# Altium PCB BLE主板.PcbDoc
Units mm, origin at the board's own origin, x right, y up, seen from the top; angles counter-clockwise.
Board outline 49 x 29 mm, 2 copper layers (Top Layer, Bottom Layer); 38 components, 25 nets, 137 pads, 120 vias.
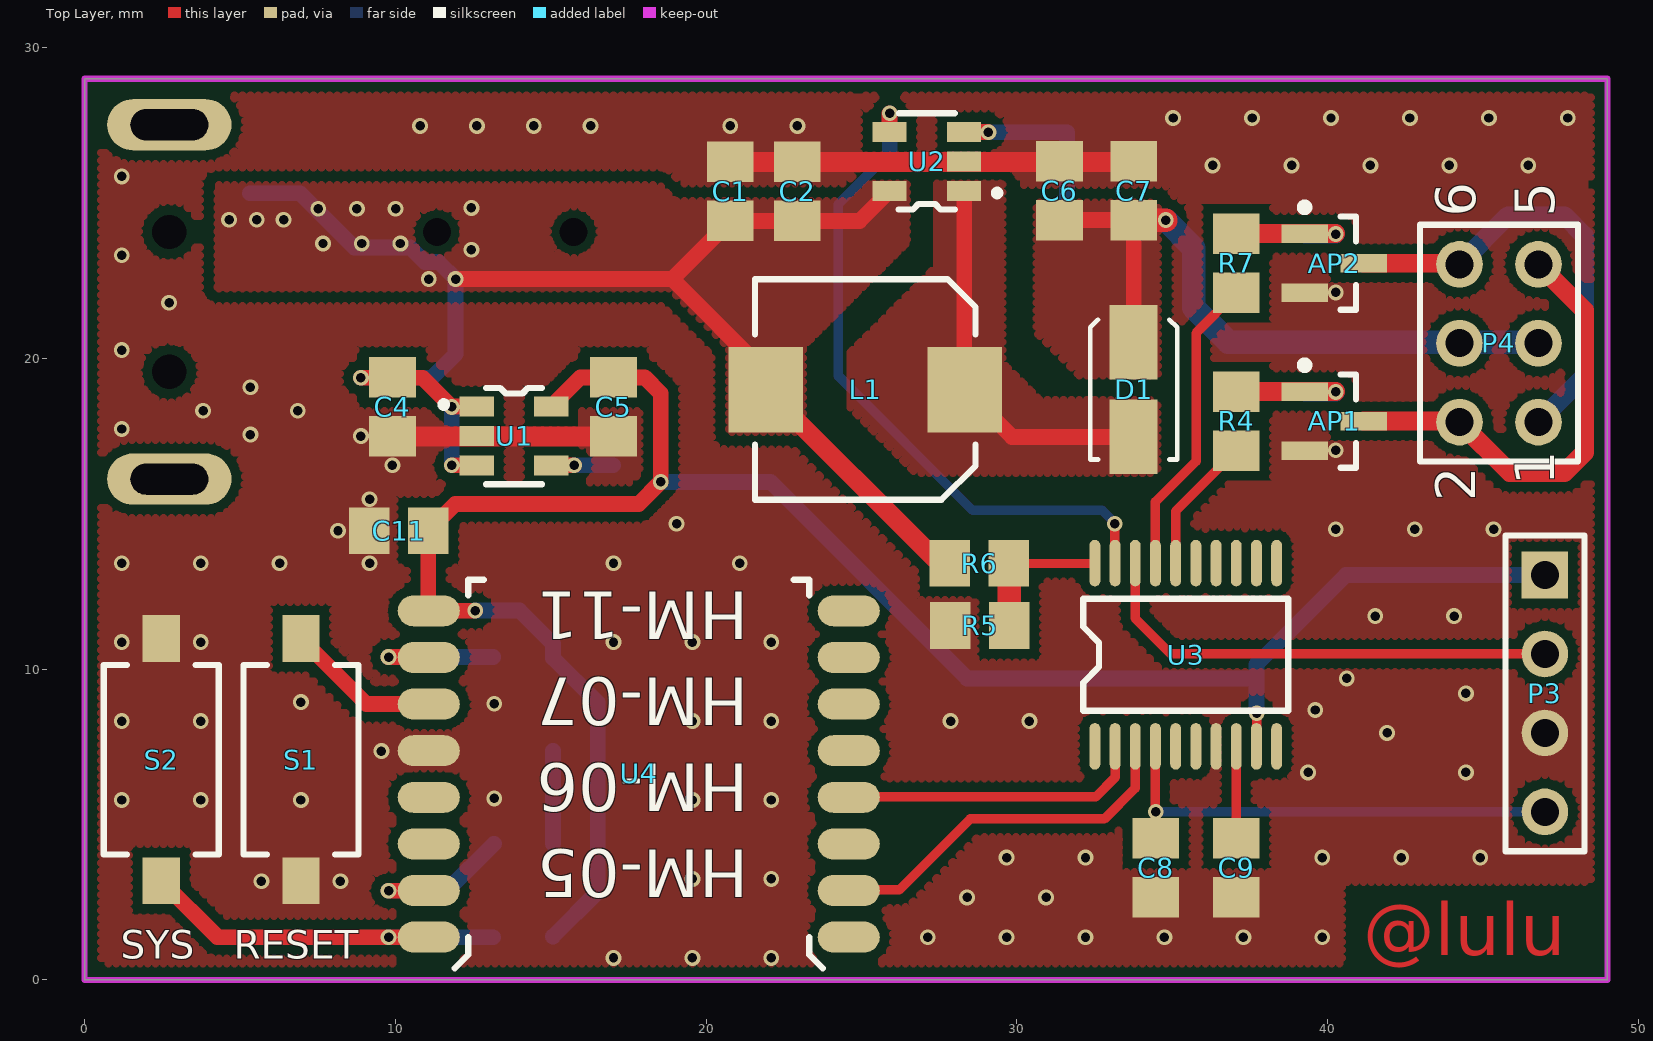
[diagram p0: Top Layer view]
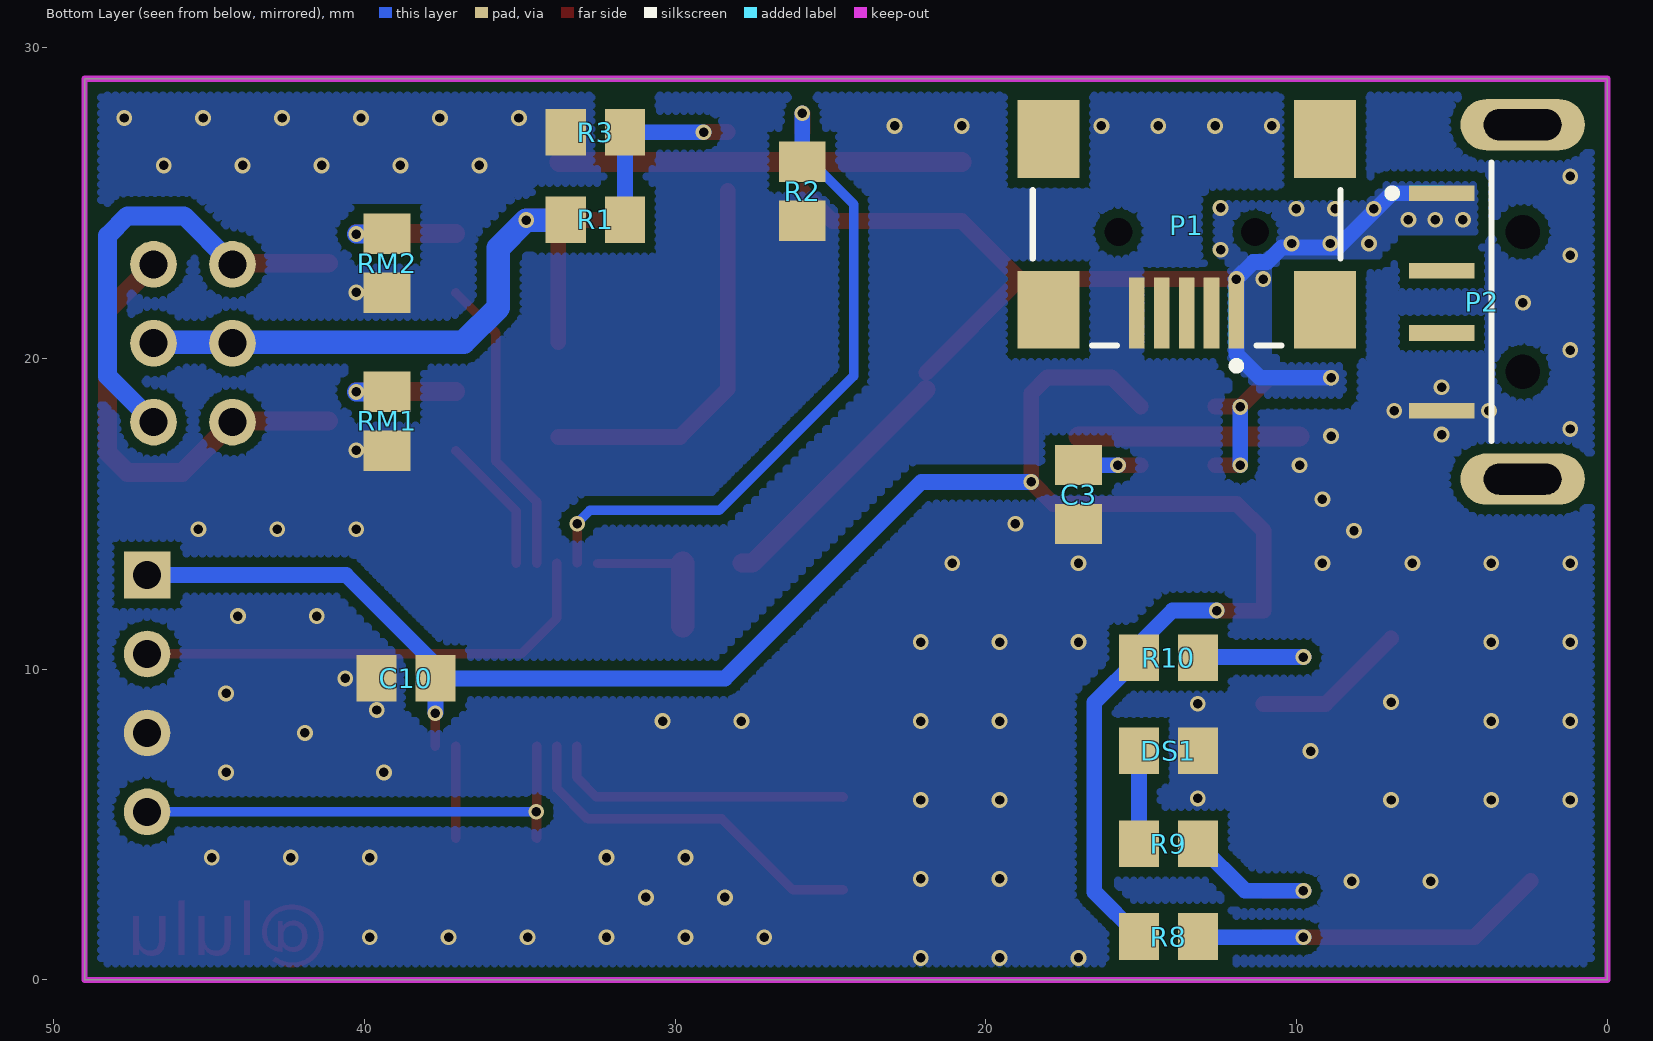
[diagram p1: Bottom Layer view, seen from below]

## Layer stack, top to bottom
Top Layer: signal copper 0.0356
Dielectric: dielectric 0.32, FR-4, Dk 4.8
Bottom Layer: signal copper 0.0356

## Board outline
0,0 49,0 49,29 0,29

## Design rules (kind name [scope] priority, off if disabled: settings)
Clearance [All] p1: gap=0.254
PolygonConnect [All] p1: connectstyle=Direct reliefconductorwidth=0.254 reliefentries=4 polygonreliefangle="90 Angle"
RoutingVias [All] p1: holewidth=0.711 width=1.27 viastyle="Through Hole" minholewidth=0.152 minwidth=0.254 maxholewidth=2.54 maxwidth=2.54
SilkscreenOverComponentPads [All] p1: minsilkscreentomaskgap=0.254
SolderMaskExpansion [All] p1: expansion=0.102
Width [All] p1: maxlimit=2.54 minlimit=0.152 preferedwidth=0.254
27 further rules are at their usual default settings.

## Components (designator, comment, footprint, x,y, rotation, side; value= is the part's Value field where it differs from the comment)
AP1 "AP2310" SOT23-3N 40.208,17.983 r0 top
AP2 "AP2310" SOT23-3N 40.208,23.063 r0 top
C1 "4.7u" 2012[0805] 20.777,25.375 r90 top
C2 "0.1u" 2012[0805] 22.936,25.375 r90 top
C3 "10n" 2012[0805] 17.018,15.621 r90 bottom
C4 "2.2u" 2012[0805] 9.906,18.44 r90 top
C5 "4.7u" 2012[0805] 17.018,18.44 r90 top
C6 "0.1u" 2012[0805] 31.369,25.4 r270 top
C7 "4.7u" 2012[0805] 33.757,25.4 r90 top
C8 "22n" 2012[0805] 34.468,3.607 r90 top
C9 "680n" 2012[0805] 37.059,3.607 r90 top
C10 "0.1u" 2012[0805] 38.659,9.703 r180 bottom
C11 "0.1u" 2012[0805] 10.109,14.453 r0 top
D1 "SS14" DIOM4227X23N[DO-214AC(SMA)] 33.757,18.999 r90 top
DS1 "LED0" 2012[0805] 14.122,7.374 r180 bottom
L1 "4.7u" INDP7070X40N 25.121,18.999 r180 top
P1 "USB_mini B_FEMALE" USB/SM0.8-6H5 13.538,29.312 r90 bottom
P2 "USB-A-MALE" USB/SM2.5-4H4 0.025,21.819 r180 bottom
P3 "DEBUG" HDR1X4 46.99,13.03 r270 top
P4 "Header 3X2" HDR2X3 46.782,17.949 r90 top
R1 "1.5M" 2012[0805] 32.563,24.46 r0 bottom
R2 "10k" 2012[0805] 25.908,25.375 r90 bottom
R3 "180k" 2012[0805] 32.563,27.28 r180 bottom
R4 "33R" 2012[0805] 37.059,17.983 r270 top
R5 "33k" 2012[0805] 28.804,11.405 r0 top
R6 "22k" 2012[0805] 28.793,13.411 r180 top
R7 "33R" 2012[0805] 37.059,23.063 r270 top
R8 "4.7k" 2012[0805] 14.122,1.397 r180 bottom
R9 "Res1" 2012[0805] 14.122,4.386 r0 bottom
R10 "0R" 2012[0805] 14.122,10.363 r0 bottom
RM1 "opt" 2012[0805] 39.268,17.983 r90 bottom
RM2 "opt" 2012[0805] 39.268,23.063 r90 bottom
S1 "RESET" 微动开关 6.96,7.087 r270 top
S2 "SYS" 微动开关 2.464,7.087 r90 top
U1 "LP2985" SOT23-5AN 13.818,17.501 r0 top
U2 "TD8210" SOT23-5AN 27.102,26.34 r180 top
U3 "STM8S103F3" TSOP65P640-20BN 35.433,10.465 r90 top
U4 "www.jnhuamao.cn" HM_05_06_07_11 24.587,12.878 r180 top

## Footprints (in the part's own frame and the unit in brackets; to place one, negate y for a bottom-side part, rotate by r counter-clockwise, add the part's x,y. Pads: shape width x height; smd on the part's side, far side on the other; paste and mask are expansions set on the pad)
2012[0805] [mm] "Chip Resistor; Body 2.0 x 1.3 mm"
  rect 1.3x1.5 smd: 1(-0.95,0) 2(0.95,0)
DIOM4227X23N[DO-214AC(SMA)] [mm]
  rect 2.4x1.55 smd: 1(-1.525,0) 2(1.525,0)
  silkscreen extent -2.25,-1.4 2.25,1.4, body extent -2.25,-1.4 2.25,1.39, height 2.3
HDR1X4 [mm] "Connector; Header;"
  rect 1.5x1.5 hole 0.9: 1(0,0)
  round 1.5 hole 0.9: 2(2.54,0) 3(5.08,0) 4(7.62,0)
  silkscreen extent -1.27,-1.27 8.89,1.27
HDR2X3 [mm] "Connector; Header; 3x"
  round 1.5 hole 0.9: 1(0,0) 2(0,2.54) 3(2.54,0) 4(2.54,2.54) 5(5.08,0) 6(5.08,2.54)
  silkscreen extent -1.27,-1.27 6.35,3.81
HM_05_06_07_11 [mm] "www.jnhuamao."
  oval 2x1 smd: 1(0,11.5) 2(0,10) 3(0,8.5) 4(0,7) 5(0,5.5) 6(0,4) 7(0,2.5) 8(0,1) 9(13.513,1) 10(13.513,2.5) 11(13.513,4) 12(13.513,5.5) 13(13.513,7) 14(13.513,8.5) 15(13.513,10) 16(13.513,11.5)
  silkscreen extent 0.83,0 12.68,12.5, body extent 0,0 13.51,18.42, height 1.2
INDP7070X40N [mm] "Precisio"
  rect 2.4x2.75 smd: 1(3.2,0) 2(-3.2,0)
  silkscreen extent -3.55,-3.55 3.55,3.55, body extent -3.55,-3.55 3.55,3.55, height 4
SOT23-3N [mm] "SOT23, 3-Leads, Body 2.9x1.3mm, Pitch 0.95mm, Lead Span 2.5mm, IPC Medi"
  rect 1.5x0.6 smd: 1(-0.95,0.95) 2(-0.95,-0.95) 3(0.95,0)
  silkscreen extent -1.07,-1.5 0.7,1.92, body extent -0.7,-1.5 0.7,1.5, height 1.1
SOT23-5AN [mm] "SOT23, 5-Leads, Body 2.9x1.6mm, Pitch 0.95mm, Lead Span 2.8mm, IPC Medi"
  rect 1.1x0.65 smd: 1(-1.2,0.95) 2(-1.2,0) 3(-1.2,-0.95) 4(1.2,-0.95) 5(1.2,0.95)
  silkscreen extent -2.36,-1.55 0.9,1.55, body extent -0.9,-1.55 0.9,1.55, height 1.45
TSOP65P640-20BN [mm] "TSOP, 20-Leads, Body 6.5x4.4mm, Pitch 0.65mm, IPC Medi"
  oval 1.5x0.35 smd: 1(-2.95,2.925) 2(-2.95,2.275) 3(-2.95,1.625) 4(-2.95,0.975) 5(-2.95,0.325) 6(-2.95,-0.325) 7(-2.95,-0.975) 8(-2.95,-1.625) 9(-2.95,-2.275) 10(-2.95,-2.925) 11(2.95,-2.925) 12(2.95,-2.275) 13(2.95,-1.625) 14(2.95,-0.975) 15(2.95,-0.325) 16(2.95,0.325) 17(2.95,0.975) 18(2.95,1.625) 19(2.95,2.275) 20(2.95,2.925)
  silkscreen extent -1.8,-3.3 1.8,3.3, body extent -2.25,-3.3 2.25,3.3, height 1.2
USB/SM0.8-6H5 [mm] "Connector; USB2.0, Type B, SM; 5 Position; Right Ang"
  rect 2.3x0.5 smd: 1(-7.85,-1.6) 2(-7.85,-0.8) 3(-7.85,0) 4(-7.85,0.8) 5(-7.85,1.6)
  rect 2.5x2 smd: 6(-7.75,4.45) 7(-2.25,4.45) 8(-7.75,-4.45) 9(-2.25,-4.45)
  round 0.6 hole 0.9 unplated: MH1(-5.25,2.2) MH2(-5.25,-2.2)
  silkscreen extent -9.67,-4.95 -3.9,4.95, body extent -8.9,-4.95 0.7,4.95, height 3.9
USB/SM2.5-4H4 [mm] "Connector; USB1.1, Type A, SM; 4 Position; Rig"
  rect 2.1x0.5 smd: 1(-5.3,3.5) 2(-5.3,1) 3(-5.3,-1) 4(-5.3,-3.5)
  oval 4x1.65 hole 1 slot 2.5 at 0 deg: 5(-2.7,-5.7) 6(-2.7,5.7)
  round 0.8 hole 1.1 unplated: MH1(-2.7,-2.25) MH2(-2.7,2.25)
  silkscreen extent -7.02,-4.47 -3.7,4.47, body extent -3.7,-6 15.2,6, height 4.5
微动开关 [mm]
  rect 1.5x1.2 smd: 1(-3.9,0) 2(3.9,0)
  silkscreen extent -3.05,-1.85 3.05,1.85, body extent -3.05,-1.85 3.05,1.85, height 2.4

## Part data
AP1 AP2: library part MOSFET-N1
C1 C7: library part "Cap Pol1", "Polarized Capacitor (Radial)"
C2 C3 C4 C5 C6: library part Cap, "Capacitor"
C8 C9 C10 C11: library part CAP, "Capacitor"
D1: library part "D Schottky", "Schott"
DS1: "Typical INFRARED GaAs LED"
L1: library part Inductor, "Inductor"
P1: library part "Header 5", "Header, 5-Pin"
P2: library part "Header 4", "Header, 4-Pin"
P3: library part CON4, "Connector"
P4: "Header, 3-Pin, Dual row"
R1 R2 R3 R5 R6 R8 R10: library part Res1, "Resistor"
R4 R7 RM1 RM2: library part RES1
R9: "Resistor"
U3: library part Component_1
U4: library part HM_05_06_07_11, "HM bluetooth module HM-05,HM-06,HM-07, HM-11"

## Via types
v1: diameter 0.508, hole 0.305, Top Layer to Bottom Layer, tented both sides, 120 vias

## Nets (pads, with @x,y where several pads share a name; then routed paths per layer and width w, separated by ;. In a path a pad name is that pad's centre, name@x,y a point inside that pad or via, vN(x,y) a via of type N, cw(c..) or ccw(c..) an arc to the next point about the centre after c; other vN are vias at no path point)
BAT: C1.1 C2.1 C4.2 L1.1 P1.1 P2.1 R6.2 U1.1 U1.3 U2.5 | length 48
  Top Layer w0.508: v1(8.89,19.38) 10.871,19.38 v1@11.801,18.451 ; v1(11.811,16.561) U1.3@12.607,16.561 ; v1(11.811,18.44) 11.821,18.451 U1.1 ; v1(11.938,22.555) 18.908,22.555 ; L1.1@21.921,19.542 18.908,22.555 ; U2.5 24.937,24.425 C2.1 C1.1 18.908,22.555
  Top Layer w0.61: L1.1 27.509,13.411 R6.2
  Bottom Layer w0.508: P2.1 6.929,25.319 8.676,23.571 10.474,23.571 10.941,23.104 11.39,23.104 v1(11.938,22.555) P1.1 11.938,20.142 11.176,19.38 v1(8.89,19.38) ; v1(11.811,16.561) v1(11.811,18.44)
  other v1: 11.074,22.555 12.446,23.495 7.671,23.698 8.915,23.698 10.16,23.698 4.648,24.46 5.537,24.46 6.401,24.46 7.518,24.816 8.763,24.816 10.008,24.816 12.446,24.841
C: AP2.3 P4.1 P4.6 | length 14.8
  Top Layer w0.61: AP2.3 P4.6@44.45,23.063
  Bottom Layer w0.61: P4.6 45.8,24.587 47.625,24.587 48.26,23.952 48.26,19.427 P4.1
C_DR: R7.2 U3.17 | length 9.8
  Top Layer w0.305: U3.17 34.458,15.388 35.763,16.693 35.763,20.818 R7.2
GND: AP1.2 AP2.2 C1.2 C2.2 C3.1 C4.1 C5.1 C6.1 C7.2 C8.1 C9.1 C10.1 C11.1 DS1.2 P1.5 P2.4 P3.3 R2.1 R3.1 R5.1 RM1.1 RM2.1 S1.2 S2.2 U1.2 U2.2 U3.7 U4.12 | length 20.1
  Top Layer w0.635: C4.1 C5.1 ; C1.2 C2.2 C7.2@33.731,26.325
  other v1: 17.018,0.711 19.558,0.711 22.098,0.711 27.127,1.372 29.667,1.372 32.207,1.372 34.747,1.372 37.287,1.372 39.827,1.372 28.397,2.654 30.937,2.654 5.69,3.175 8.23,3.175 19.558,3.251 22.098,3.251 29.667,3.937 32.207,3.937 39.827,3.937 42.367,3.937 44.907,3.937 1.194,5.791 3.734,5.791 6.96,5.791 19.558,5.791 22.098,5.791 13.183,5.842 39.37,6.68 44.45,6.68 9.55,7.366 41.91,7.95 1.194,8.331 3.734,8.331 19.558,8.331 22.098,8.331 27.864,8.331 30.404,8.331 39.599,8.687 13.183,8.89 6.96,8.941 44.45,9.22 40.615,9.703 1.194,10.871 3.734,10.871 17.018,10.871 19.558,10.871 22.098,10.871 41.529,11.709 44.069,11.709 1.194,13.411 3.734,13.411 6.274,13.411 9.169,13.411 17.018,13.411 21.082,13.411 8.153,14.453 40.259,14.503 42.799,14.503 45.339,14.503 19.05,14.681 9.169,15.469 9.906,16.561 40.259,17.043 8.89,17.501 5.334,17.551 1.194,17.729 3.81,18.313 6.858,18.313 5.334,19.075 1.194,20.269 2.718,21.793 40.259,22.123 1.194,23.317 1.194,25.857 36.297,26.213 38.837,26.213 41.377,26.213 43.917,26.213 46.457,26.213 10.795,27.483 12.624,27.483 14.453,27.483 16.281,27.483 20.777,27.483 22.936,27.483 35.027,27.737 37.567,27.737 40.107,27.737 42.647,27.737 45.187,27.737 47.727,27.737
LED+: C6.2 C7.1 D1.2 P4.3 P4.4 R1.2 | length 23.6
  Top Layer w0.508: C6.2 C7.1 D1.2
  Top Layer w0.762: C7.1 v1(34.788,24.45)
  Bottom Layer w0.762: R1.2@33.523,24.45 v1(34.788,24.45) 35.687,23.551 35.687,21.641 36.805,20.523 44.45,20.523 P4.3@46.99,20.523
NetAP1_1: AP1.1 R4.1 RM1.2 | length 4.2
  Top Layer w0.61: R4.1 v1@40.259,18.933
  Bottom Layer w0.61: RM1.2@39.279,18.923 v1(40.259,18.923)
NetAP2_1: AP2.1 R7.1 RM2.2 | length 4.2
  Top Layer w0.61: R7.1 v1@40.259,24.013
  Bottom Layer w0.61: RM2.2@39.279,24.003 v1(40.259,24.003)
NetC3_2: C3.2 U1.4 | length 2
  Top Layer w0.508: U1.4@15.028,16.561 v1(15.748,16.561)
  Bottom Layer w0.508: v1(15.748,16.561) C3.2@17.008,16.561
NetC9_2: C9.2 U3.8 | length 3
  Top Layer w0.305: C9.2 U3.8
NetD1_1: D1.1 L1.2 U2.1 | length 12.5
  Top Layer w0.508: U2.1 28.302,19.018 L1.2 29.846,17.474 D1.1
NetDS1_1: DS1.1 R9.2 | length 3
  Bottom Layer w0.508: R9.2 DS1.1
NetR1_1: R1.1 R3.2 U2.3 | length 6.1
  Top Layer w0.508: U2.3 v1@29.073,27.29
  Bottom Layer w0.508: v1(29.083,27.28) R3.2 R1.1
NetR5_2: R5.2 R6.1 U3.20 | length 4.7
  Top Layer w0.305: R6.1@29.754,13.401 U3.20@32.494,13.401
  Top Layer w0.762: R5.2 R6.1@29.754,13.401
NetR8_2: R8.2 S2.1 U4.16 | length 12.7
  Top Layer w0.508: S2.1 4.279,1.372 v1(9.779,1.372) U4.16@11.068,1.372
  Bottom Layer w0.508: v1(9.779,1.372) R8.2@13.147,1.372
NetR9_1: R9.1 U4.15 | length 5.3
  Top Layer w0.508: v1(9.779,2.87) U4.15@11.067,2.87
  Bottom Layer w0.508: v1(9.779,2.87) 11.657,2.87 R9.1
NetR10_1: R10.1 U4.10 | length 4.7
  Top Layer w0.508: v1(9.779,10.389) U4.10@11.064,10.389
  Bottom Layer w0.508: v1(9.779,10.389) R10.1@13.147,10.389
NetS1_1: S1.1 U4.11 | length 5
  Top Layer w0.508: S1.1 9.068,8.878 U4.11
NRST: C8.2 P3.4 U3.4 | length 16.3
  Top Layer w0.305: C8.2@34.458,4.567 U3.4 ; C8.2@34.468,4.576 v1(34.468,5.41)
  Bottom Layer w0.305: v1@34.442,5.41 v1(34.468,5.41) P3.4
RX: U3.3 U4.2 | length 11.9
  Top Layer w0.305: U4.2@24.587,2.896 26.213,2.896 28.499,5.182 32.817,5.182 33.808,6.173 U3.3
SPS_EN: R2.2 U2.4 U3.19 | length 22
  Top Layer w0.305: U3.19@33.147,13.426 v1(33.147,14.681)
  Top Layer w0.508: U2.4 v1@25.902,27.883
  Bottom Layer w0.305: R2.2 25.613,26.325 24.257,24.968 24.257,19.431 28.575,15.113 32.741,15.113 v1@33.16,14.694
  Bottom Layer w0.508: R2.2 v1(25.908,27.889)
SWIM: P3.2 U3.18 | length 15.4
  Top Layer w0.305: U3.18 33.808,11.633 34.95,10.49 P3.2
TX: U3.2 U4.4 | length 9.8
  Top Layer w0.305: U4.4 24.602,5.893 32.535,5.893 33.158,6.516 U3.2
VCC: C5.2 C10.2 C11.2 P3.1 R8.1 R10.2 U1.5 U3.9 U4.9 | length 67.6
  Top Layer w0.305: U3.9@37.719,7.526 v1(37.719,8.585)
  Top Layer w0.508: U4.9@11.059,11.893 C11.2 11.923,15.316 17.831,15.316 v1(18.542,16.027) 18.542,18.872 18.024,19.39 C5.2 15.957,19.39 U1.5 ; U4.9 v1@12.564,11.878
  Bottom Layer w0.508: v1(12.573,11.887) 13.995,11.887 15.072,10.81 R10.2 16.51,8.926 16.51,2.835 R8.1 ; v1(18.542,16.027) 22.073,16.027 28.397,9.703 C10.2 ; v1@37.709,8.595 C10.2 ; P3.1 40.589,13.03 37.709,10.15 C10.2
W: AP1.3 P4.2 P4.5 | length 14.9
  Top Layer w0.61: AP1.3 P4.2@44.45,17.983 ; P4.2 45.859,16.332 47.625,16.332 48.26,16.967 48.26,21.551 P4.5
W_DR: R4.2 U3.16 | length 4.4
  Top Layer w0.305: U3.16 35.108,15.083 R4.2
pads on no net: P1.2 P1.3 P1.4 P1.6 P1.7 P1.8 P1.9 P1.MH1 P1.MH2 P2.2 P2.3 P2.5 P2.6 P2.MH1 P2.MH2 U3.1 U3.5 U3.6 U3.10 U3.11 U3.12 U3.13 U3.14 U3.15 U4.1 U4.3 U4.5 U4.6 U4.7 U4.8 U4.13 U4.14

## Polygon pours and split planes (outlines as drawn)
GND on Top Layer "GND" (hatched 90Degree grid 0.254 track 0.254, remove dead copper, pour order 16): 0,29 49,29 49,0 0,0
LED+ on Top Layer "LED+" (hatched 90Degree grid 0.254 track 0.254, remove dead copper, pour order 14): 30.632,25.019 34.519,25.019 34.544,24.994 34.544,19.456 32.004,19.456 30.632,20.828 30.632,20.98
NetD1_1 on Top Layer "L" (hatched 90Degree grid 0.254 track 0.254, remove dead copper, pour order 12): 27.305,25.654 29.54,25.654 29.54,19.863 30.734,18.669 34.519,18.669 34.519,16.307 26.899,16.307 26.746,16.307 24.638,18.415 24.638,19.939 24.638,20.193 27.305,22.86
BAT on Top Layer "BAT" (hatched 90Degree grid 0.254 track 0.254, remove dead copper, pour order 4): 4.267,25.578 18.491,25.578 18.999,25.07 23.952,25.07 24.714,25.07 25.349,25.705 26.467,25.705 26.467,23.724 23.114,20.371 23.114,17.628 20.726,17.628 20.726,20.345 18.821,22.25 4.267,22.25
GND on Bottom Layer "GND" (hatched 90Degree grid 0.254 track 0.254, remove dead copper, pour order 18): 0,29 49,29 49,0 0,0
BAT on Bottom Layer "BAT" (hatched 90Degree grid 0.254 track 0.254, remove dead copper, pour order 8): 4.267,25.578 7.112,25.578 7.722,24.968 12.573,24.968 12.573,23.444 12.192,23.063 12.192,20.015 10.998,18.821 8.509,18.821 8.509,19.761 10.033,19.761 10.414,19.761 10.922,20.269 10.922,22.809 10.414,23.317 7.874,23.317 7.366,23.317 6.604,24.079 4.267,24.079

## Keep-outs
Keep-Out Layer:
  the board outline again, w0.2

## Other copper
Top Layer:
  pour cut-out: 34.747,21.082 35.433,21.082 35.433,16.51 34.747,16.51
  pour cut-out: 26.594,26.137 27.356,26.137 27.356,25.806 26.594,25.806
  pour cut-out: 29.769,25.578 30.556,25.578 30.556,25.197 29.769,25.197
  text "@lulu" at 41.148,0.787 h1.68

## Silkscreen, mask and mechanical layers (free items; w line width, h text height)
Top Solder:
  rectangle: 40.767,0.127 48.87,2.819

## Text inside footprints (layer, text, board x,y; h text height)
P1: Mechanical 1 "PCB Edge" at 9.502,29.744 h0.25 r180
P2: Mechanical 1 "PCB Edge" at -0.447,16.646 h0.25 r270
P4: Top Overlay "6" at 44.75,24.553 h1.27 r90; Top Overlay "5" at 47.29,24.553 h1.27 r90; Top Overlay "2" at 44.75,15.409 h1.27 r90; Top Overlay "1" at 47.29,15.917 h1.27 r90
U4: Top Overlay "HM-11" at 21.361,12.497 h1.52 r180; Top Overlay "HM-05" at 21.361,4.191 h1.52 r180; Top Overlay "HM-06" at 21.361,6.96 h1.52 r180; Top Overlay "HM-07" at 21.361,9.728 h1.52 r180